# Altium PCB TankBoardPCB1.PcbDoc
Units mm, origin at the board's own origin, x right, y up, seen from the top; angles counter-clockwise.
Board outline 63.56 x 84.17 mm, 2 copper layers (Top Layer, Bottom Layer); 87 components, 60 nets, 330 pads, 226 vias.
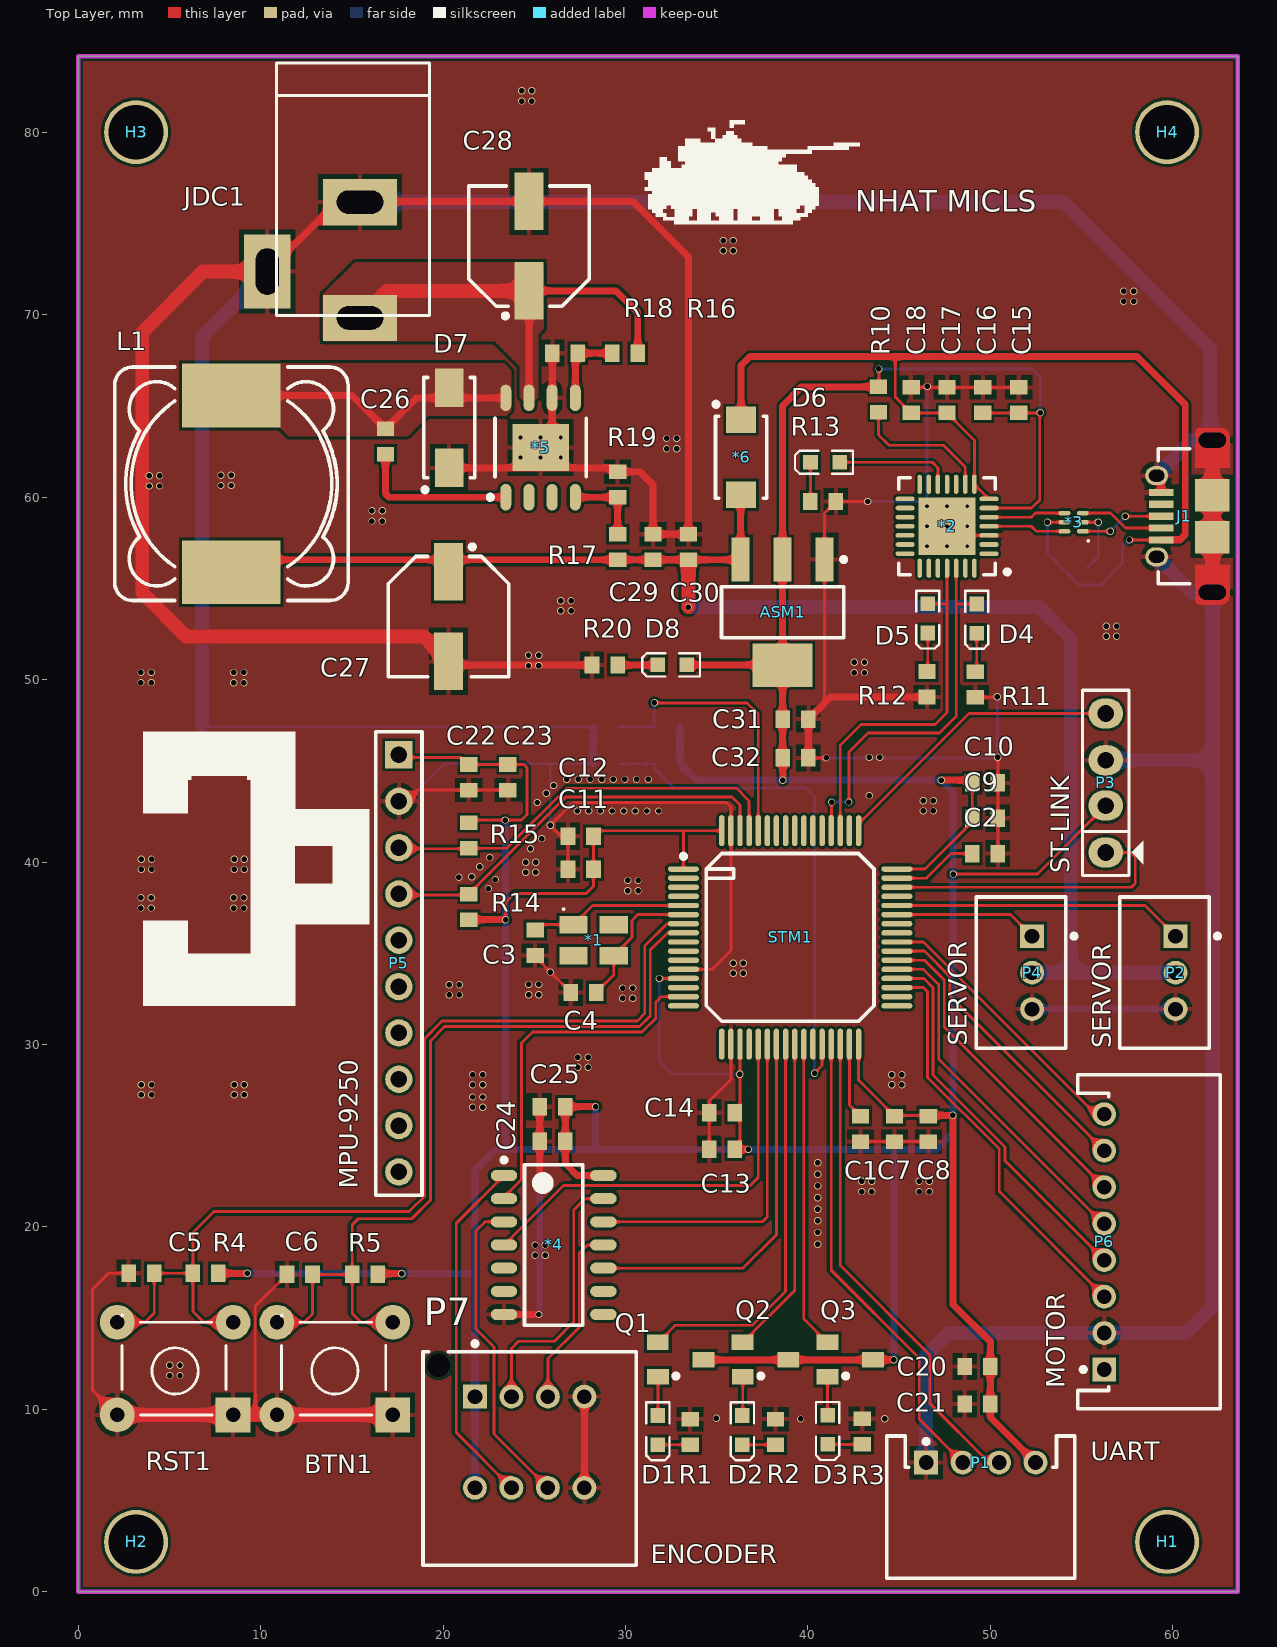
[diagram p0: Top Layer view]
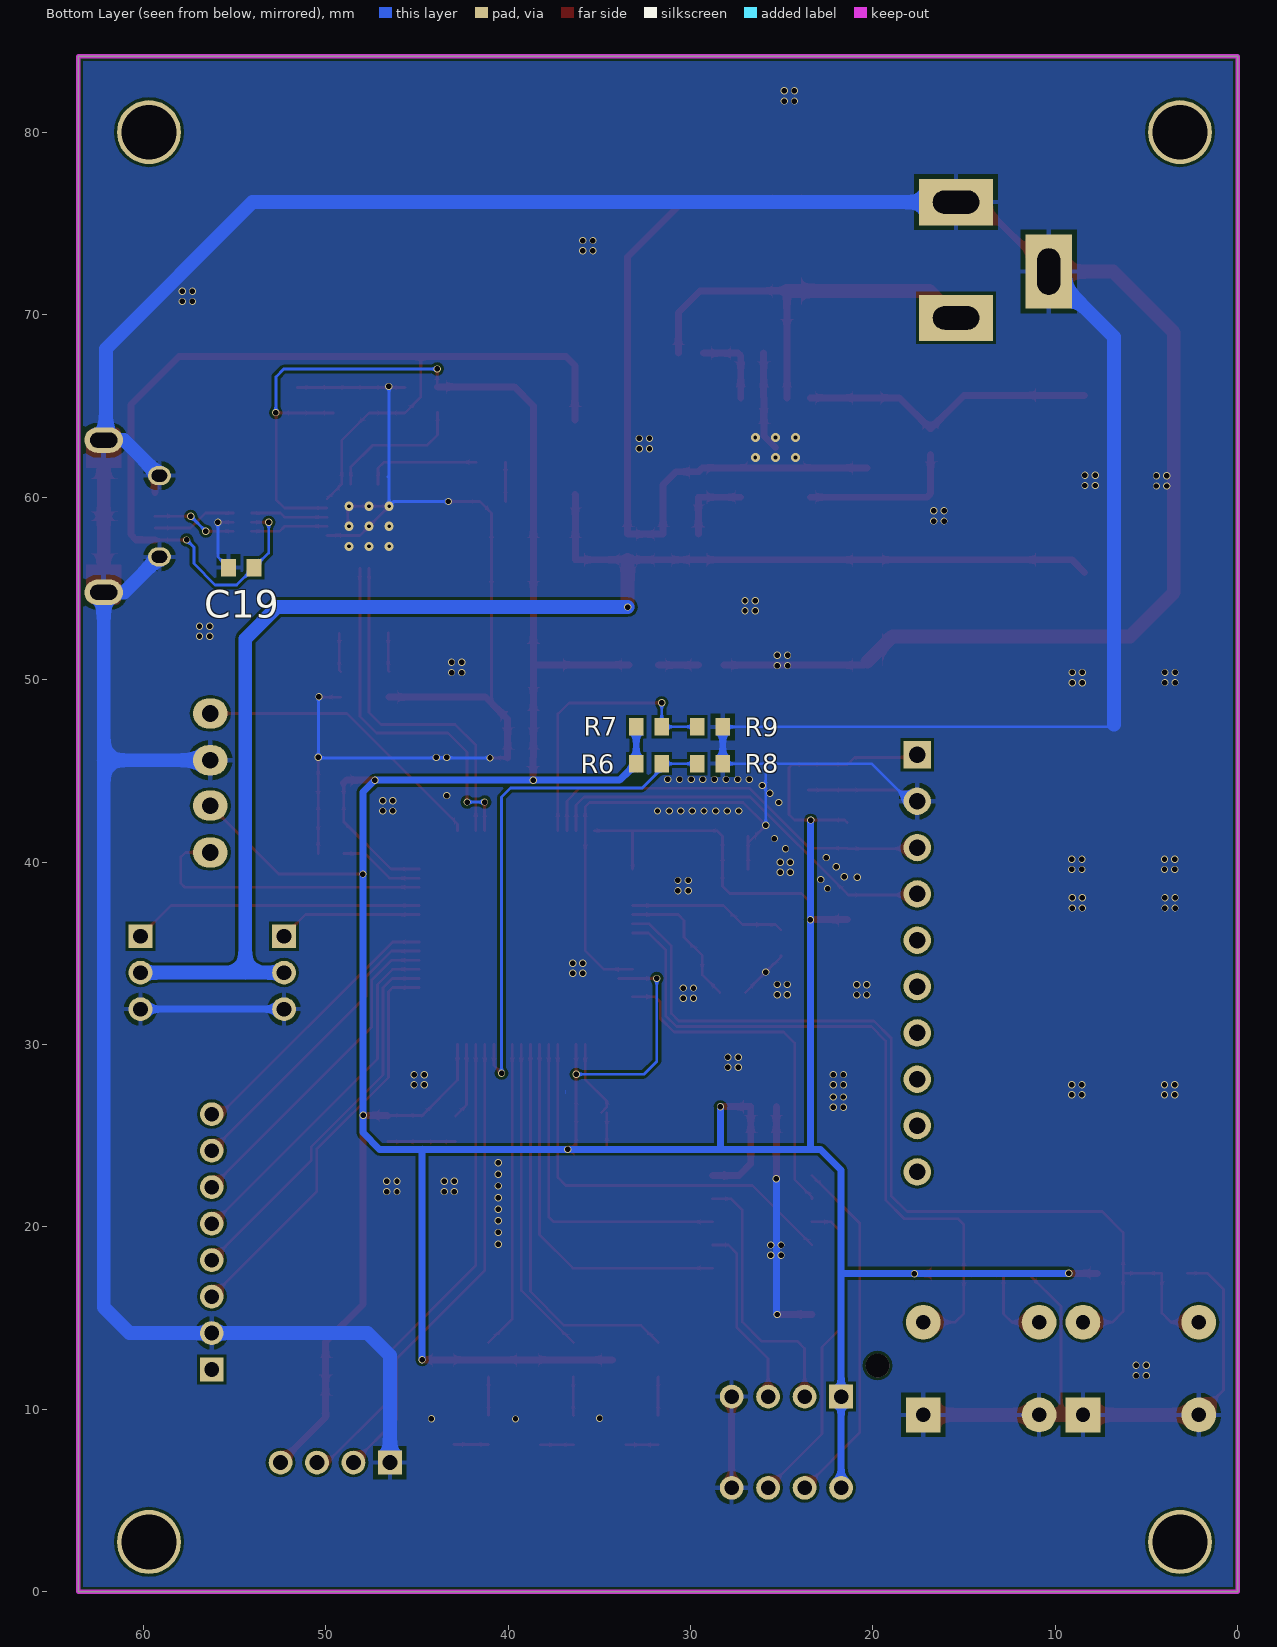
[diagram p1: Bottom Layer view, seen from below]
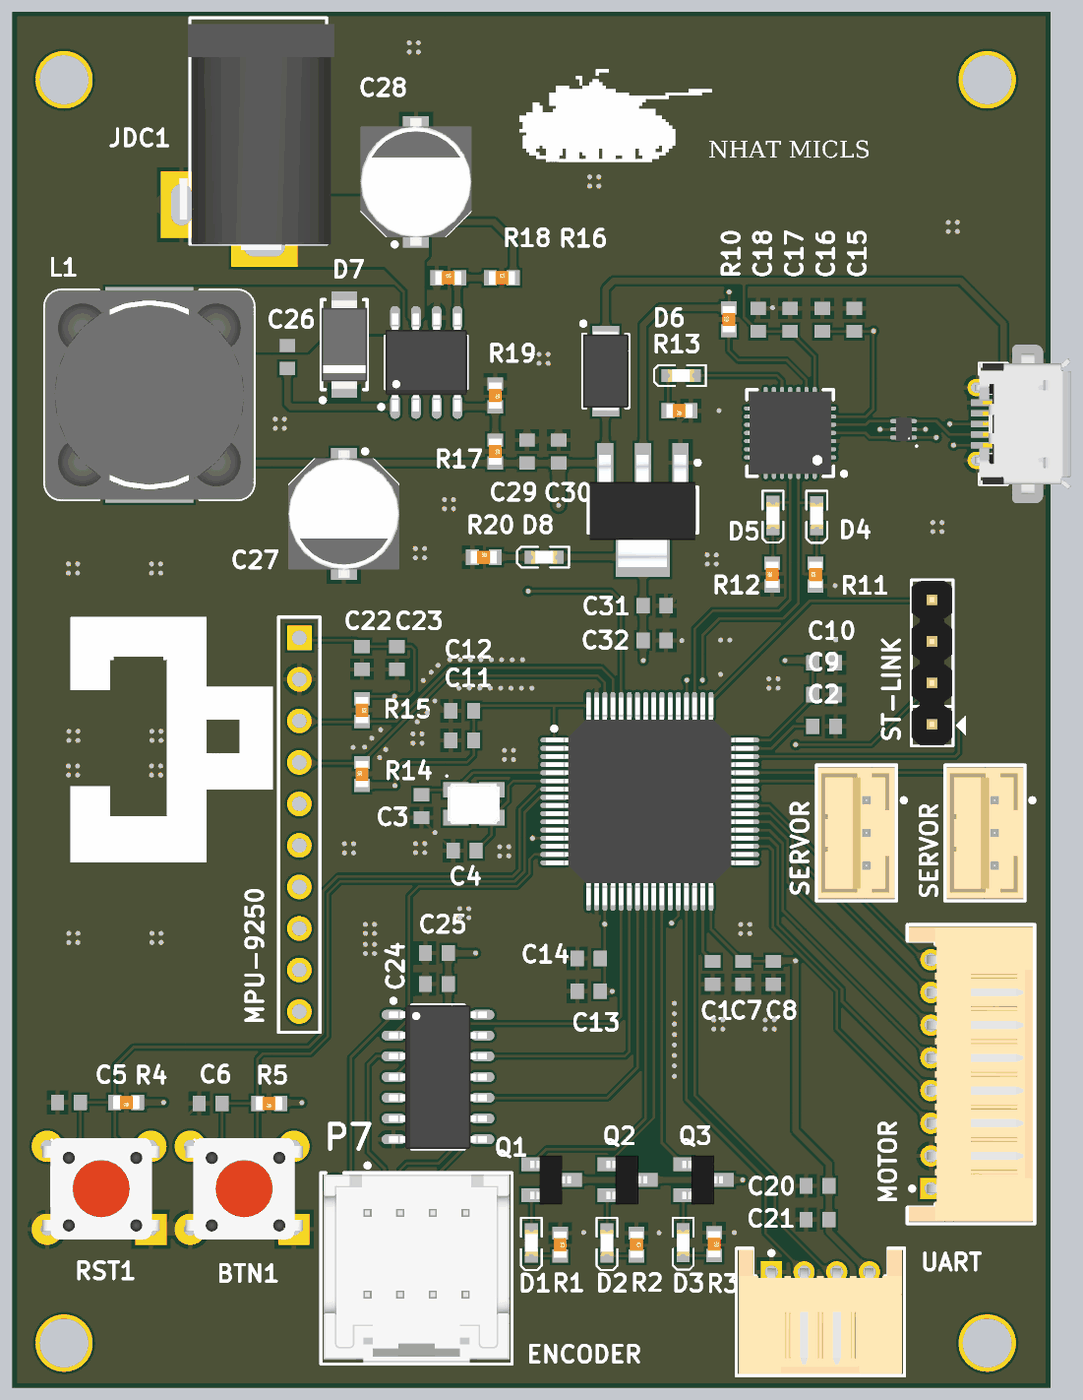
[diagram p2: 3D render of the assembled board from above, using the file's embedded part models]
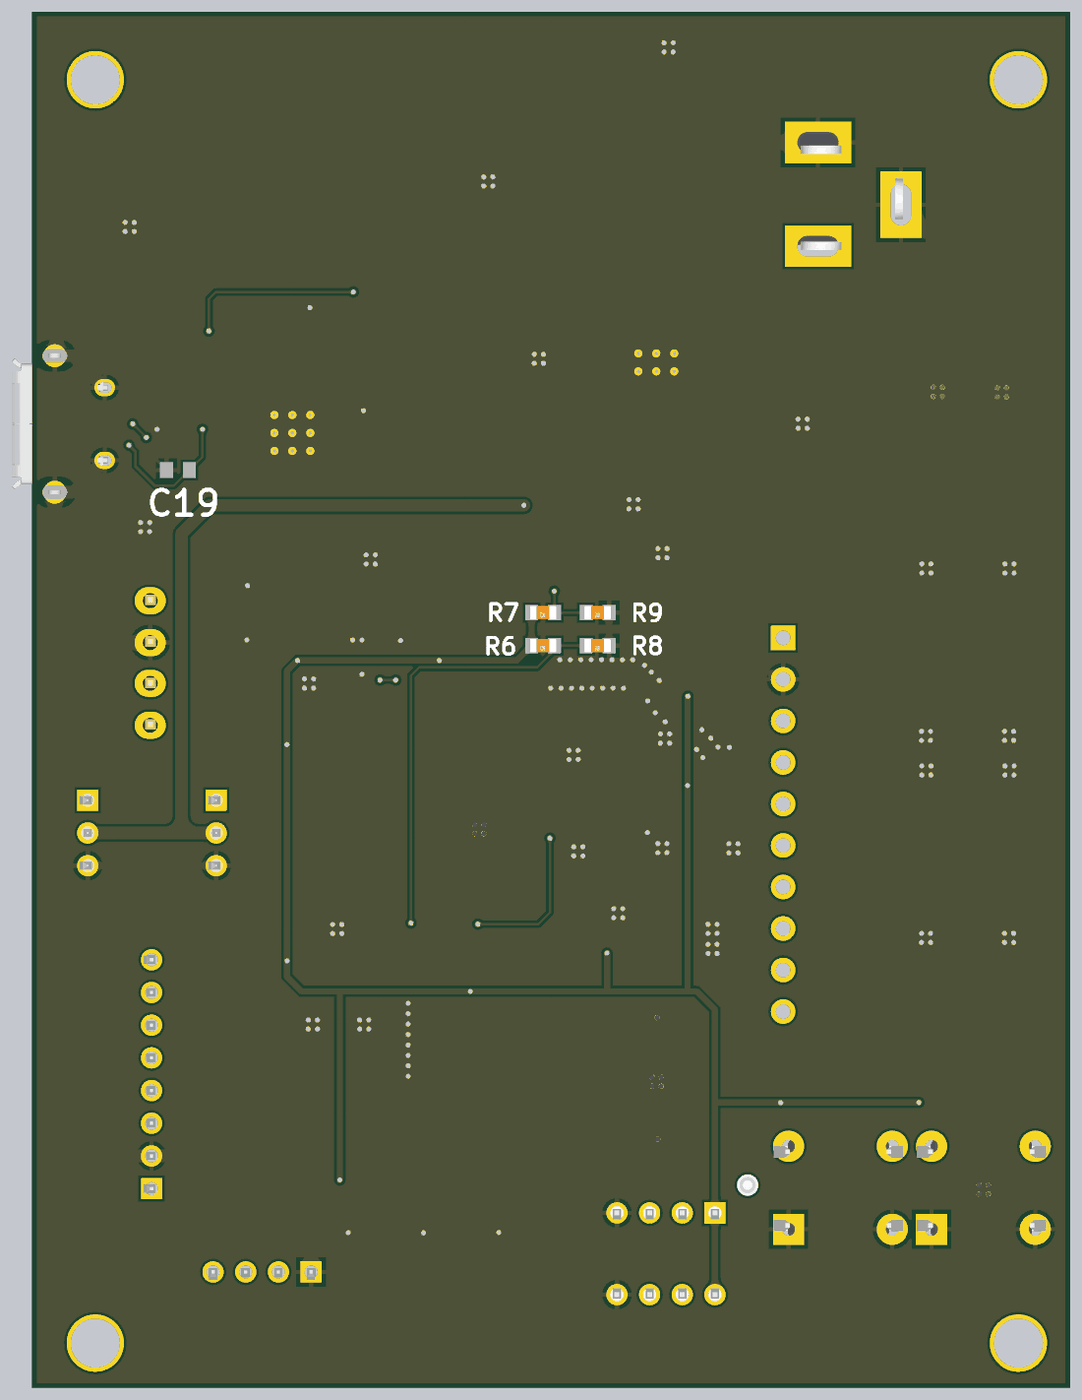
[diagram p3: 3D render of the assembled board from below, using the file's embedded part models]

## Layer stack, top to bottom
Top Solder: solder mask 0.0102, Solder Resist, Dk 3.5
Top Layer: signal copper 0.0356
Dielectric 1: dielectric 0.32, FR-4, Dk 4.8
Bottom Layer: signal copper 0.0356
Bottom Solder: solder mask 0.0102, Solder Resist, Dk 3.5

## Board outline
0,0 0,84.171 63.561,84.171 63.561,0

## Design rules (kind name [scope] priority, off if disabled: settings)
Clearance [All] p1: gap=0.152 ignorepadtopadclearanceinfootprint=FALSE
DiffPairsRouting [All] p1: maxlimit=0.254 minlimit=0.254 mostfreqgap=0.254 toplayer_minwidth=0.152 toplayer_maxwidth=0.762 toplayer_prefwidth=0.381 bottomlayer_minwidth=0.152 bottomlayer_maxwidth=0.762 bottomlayer_prefwidth=0.381 maxuncoupledlength=12.7
HoleSize [All] p1: absolutevalues=TRUE maxlimit=4 minlimit=0.025 maxpercent=80.000 minpercent=20.000
HoleToHoleClearance [All] p1: gap=0 allowstackedmicrovias=TRUE
MinimumSolderMaskSliver [All] p1: minsoldermaskwidth=0
PolygonConnect PolygonConnect_2 [InNet('GND') vs InNet('GND')] p1: thpad.connectstyle=Relief thpad.reliefconductorwidth=0.254 thpad.reliefentries=4 thpad.polygonreliefangle="90 Angle" thpad.airgapwidth=0.254 smdpad.connectstyle=Relief smdpad.reliefconductorwidth=0.254 smdpad.reliefentries=4 smdpad.polygonreliefangle="90 Angle" smdpad.airgapwidth=0.254 via.connectstyle=Direct via.reliefconductorwidth=0.254 via.reliefentries=4 via.polygonreliefangle="90 Angle" via.airgapwidth=0.254
PolygonConnect PolygonConnect_1 [InNet('VIN') vs InNet('VIN')] p2: connectstyle=Direct reliefconductorwidth=0.254 reliefentries=4 polygonreliefangle="90 Angle" airgapwidth=0.254
PolygonConnect [InNet('PH') vs InNet('PH')] p3: connectstyle=Direct reliefconductorwidth=0.254 reliefentries=4 polygonreliefangle="90 Angle" airgapwidth=0.254
RoutingVias [All] p1: holewidth=0.3 width=0.4 viastyle="Through Hole" minholewidth=0.2 minwidth=0.4 maxholewidth=0.711 maxwidth=1.27
SilkToSilkClearance [All] p1: silktosilkclearance=0
SilkToSolderMaskClearance [IsPad] p1: minsilkscreentomaskgap=0 clearancetoexposedcopper=TRUE
SolderMaskExpansion [All] p1: expansion=0
Width [All] p1: maxlimit=0.762 minlimit=0.152 preferedwidth=0.381
24 further rules are at their usual default settings.

## Classes and differential pairs
component class TankBoardSheet4: *5 *6 ASM1 C26 C27 C28 C29 C30 C31 C32 D7 D8 JDC1 L1 R16 R17 R18 R19 R20
component class TankBoardSheet3: *4 C20 C21 C22 C23 C24 C25 H1 H2 H3 H4 P1 P2 P3 P4 P5 P7 R14 R15
component class TankBoardSheet2: *2 *3 C15 C16 C17 C18 C19 D4 D5 D6 J1 R10 R11 R12 R13
component class TankBoardSheet1: *1 BTN1 C1 C2 C3 C4 C5 C6 C7 C8 C9 C10 C11 C12 C13 C14 D1 D2 D3 Q1 Q2 Q3 R1 R2 R3 R4 R5 R6 R7 R8 R9 RST1 STM1
differential pair D1: +D1_P -D1_N
differential pair D: +D_P -D_N

## Components (designator, comment, footprint, x,y, rotation, side; value= is the part's Value field where it differs from the comment)
*1 "XTAL" "XTAL SMD 4PIN" 28.251,35.721 r0 top
*2 "CP2102" QFN50P500X500X90_HS-29N 47.624,58.407 r180 top
*3 "USBULC6-2M6" QFN50P100X145X60-6N 54.566,58.628 r180 top
*4 "74HC14" SOIC108P600X170-14N 26.063,19.006 r0 top
*5 "TPS5430" SOIC127P600X170_HS-9N 25.341,62.724 r90 top
*6 "Diode" "DIODE SMA (DO-214AC)" 36.334,62.194 r90 top
ASM1 "LM1117" SOT223-4N 38.609,53.687 r270 top value=LM317
BTN1 "SW" "Tact SW 4 pin" 17.241,9.691 r180 top value="Button chip 4 pin"
C1 "Cap Non-Pol SMD" CAP-SM-0603 42.882,25.375 r90 top value=100pF
C2 "Cap Non-Pol SMD" CAP-SM-0603 49.712,40.461 r180 top value=100pF
C3 "Cap Non-Pol SMD" CAP-SM-0603 25.046,35.576 r90 top value=100pF
C4 "Cap Non-Pol SMD" CAP-SM-0603 27.693,32.852 r0 top value=100pF
C5 "Cap Non-Pol SMD" CAP-SM-0603 3.462,17.455 r180 top value=100nF
C6 "Cap Non-Pol SMD" CAP-SM-0603 12.14,17.394 r180 top value=100nF
C7 "Cap Non-Pol SMD" CAP-SM-0603 44.741,25.375 r270 top value=100nF
C8 "Cap Non-Pol SMD" CAP-SM-0603 46.601,25.375 r270 top value=10uF
C9 "Cap Non-Pol SMD" CAP-SM-0603 49.712,42.4 r0 top value=100nF
C10 "Cap Non-Pol SMD" CAP-SM-0603 49.712,44.339 r0 top value=10uF
C11 "Cap Non-Pol SMD" CAP-SM-0603 27.544,39.606 r180 top value=100nF
C12 "Cap Non-Pol SMD" CAP-SM-0603 27.544,41.413 r180 top value=10uF
C13 "Cap Non-Pol SMD" CAP-SM-0603 35.29,24.255 r180 top value=100nF
C14 "Cap Non-Pol SMD" CAP-SM-0603 35.29,26.26 r180 top value=10uF
C15 "Cap Non-Pol SMD" CAP-SM-0603 51.555,65.319 r90 top value=100nF
C16 "Cap Non-Pol SMD" CAP-SM-0603 49.589,65.319 r90 top value=10uF
C17 "Cap Non-Pol SMD" CAP-SM-0603 47.624,65.319 r90 top value=100nF
C18 "Cap Non-Pol SMD" CAP-SM-0603 45.658,65.319 r90 top value=10uF
C19 "Cap Non-Pol SMD" CAP-SM-0603 54.629,56.141 r0 bottom value=100nF
C20 "Cap Non-Pol SMD" CAP-SM-0603 49.299,12.349 r180 top value=100nF
C21 "Cap Non-Pol SMD" CAP-SM-0603 49.299,10.291 r180 top value=10uF
C22 "Cap Non-Pol SMD" CAP-SM-0603 21.403,44.646 r270 top value=100nF
C23 "Cap Non-Pol SMD" CAP-SM-0603 23.549,44.646 r270 top value=10uF
C24 "Cap Non-Pol SMD" CAP-SM-0603 25.997,24.689 r180 top value=100nF
C25 "Cap Non-Pol SMD" CAP-SM-0603 25.997,26.587 r180 top value=10uF
C26 "Cap Non-Pol SMD" CAP-SM-0603 16.839,63.053 r270 top value=10nF
C27 "Cap Pol SMD" "CAP ALU SIZE D" 20.298,53.452 r270 top value=220uF
C28 "Cap Pol SMD" "CAP ALU SIZE D" 24.711,73.765 r90 top value=220uF
C29 "Cap Non-Pol SMD" CAP-SM-0603 31.507,57.273 r90 top value=100nF
C30 "Cap Non-Pol SMD" CAP-SM-0603 33.447,57.273 r90 top value=10uF
C31 "Cap Non-Pol SMD" CAP-SM-0603 39.325,47.833 r0 top value=100nF
C32 "Cap Non-Pol SMD" CAP-SM-0603 39.325,45.709 r0 top value=10uF
D1 "LED SMD" LED_0603_Blue 31.777,8.858 r270 top
D2 "LED SMD" LED_0603_Blue 36.408,8.858 r270 top
D3 "LED SMD" LED_0603_Blue 41.075,8.875 r270 top
D4 "LED SMD" LED_0603_Blue 49.252,53.345 r270 top
D5 "LED SMD" LED_0603_Blue 46.569,53.354 r270 top
D6 "LED SMD" LED_0603_Blue 40.942,61.918 r180 top
D7 "D Schottky" SS34 20.33,63.809 r90 top
D8 "LED SMD" LED_0603_Blue 32.561,50.809 r180 top
H1 "Hole" "LO KHOAN 3MM" 59.688,2.731 r0 top
H2 "Hole" "LO KHOAN 3MM" 3.166,2.731 r0 top
H3 "Hole" "LO KHOAN 3MM" 3.166,80.012 r0 top
H4 "Hole" "LO KHOAN 3MM" 59.688,80.012 r0 top
J1 "629105150921" 629105150921 62.168,58.957 r90 top
JDC1 "Jack DC" DC-IN 12.9,73.003 r270 top value="Jac DC"
L1 "Inductor" "INDUCTOR 12.5x12.5" 8.39,60.735 r270 top value=22uH
P1 "62000411722" 62000411722 49.476,4.632 r0 top
P2 "62000311622" 62000311622 59.551,33.936 r90 top
P3 "Header 4" JP4 56.325,43.066 r90 top
P4 "62000311622" 62000311622 51.684,33.936 r90 top
P5 "Header 10" HDR1X10 17.572,45.873 r270 top
P6 "62000811722" 62000811722 58.694,19.18 r90 top
P7 "62400821622" 62400821622 24.746,7.295 r0 top
Q1 "C1815" SOT23B 33.019,12.714 r270 top
Q2 "C1815" SOT23B 37.669,12.714 r270 top
Q3 "C1815" SOT23B 42.32,12.714 r270 top
R1 "RESISTOR SMD" RES-SM-0603 33.542,9.445 r270 top value=1K
R2 "RESISTOR SMD" RES-SM-0603 38.218,9.446 r270 top value=1K
R3 "RESISTOR SMD" RES-SM-0603 42.973,9.47 r270 top value=1K
R4 "RESISTOR SMD" RES-SM-0603 7.667,17.455 r180 top value=10K
R5 "RESISTOR SMD" RES-SM-0603 16.403,17.394 r180 top value=10K
R6 "RESISTOR SMD" RES-SM-0603 31.589,45.394 r0 bottom value=0
R7 "RESISTOR SMD" RES-SM-0603 31.589,47.411 r0 bottom value=0
R8 "RESISTOR SMD" RES-SM-0603 28.248,45.394 r0 bottom value=0
R9 "RESISTOR SMD" RES-SM-0603 28.248,47.411 r0 bottom value=0
R10 "RESISTOR SMD" RES-SM-0603 43.866,64.668 r90 top value=4.7K
R11 "RESISTOR SMD" RES-SM-0603 49.178,49.05 r90 top value=1K
R12 "RESISTOR SMD" RES-SM-0603 46.523,49.06 r90 top value=1K
R13 "RESISTOR SMD" RES-SM-0603 41.519,59.765 r180 top value=1K
R14 "RESISTOR SMD" RES-SM-0603 21.403,36.856 r90 top value=10K
R15 "RESISTOR SMD" RES-SM-0603 21.403,42.139 r270 top value=10K
R16 "RESISTOR SMD" RES-SM-0603 29.283,67.896 r0 top value=1K
R17 "RESISTOR SMD" RES-SM-0603 29.567,57.959 r270 top value=10K
R18 "RESISTOR SMD" RES-SM-0603 26.001,67.896 r0 top value=1K
R19 "RESISTOR SMD" RES-SM-0603 29.567,61.383 r270 top value=3.24K
R20 "RESISTOR SMD" RES-SM-0603 28.177,50.8 r0 top value=1K
RST1 "SW" "Tact SW 4 pin" 8.485,9.691 r180 top value="Button chip 4 pin"
STM1 "STM32F405" CQFP50P1150X1150X160-64N 39.024,35.867 r0 top

## Footprints (in the part's own frame and the unit in brackets; to place one, negate y for a bottom-side part, rotate by r counter-clockwise, add the part's x,y. Pads: shape width x height; smd on the part's side, far side on the other; paste and mask are expansions set on the pad)
62000311622 [mm] "2.00mm Male Vertical Shrouded Header, 3p"
  rect 1.3x1.3 hole 0.8: 1(2,-0.6)
  round 1.3 hole 0.8: 2(0,-0.6) 3(-2,-0.6)
  silkscreen extent -4.15,-3.03 4.15,2.45, body extent -4,-2.35 4,2.35, height 6.13
62000411722 [mm] "2.00mm Male Horizontal Shrouded Header, 4p"
  rect 1.3x1.3 hole 0.8: 1(-3,2.45)
  round 1.3 hole 0.8: 2(-1,2.45) 3(1,2.45) 4(3,2.45)
  silkscreen extent -5.15,-3.9 5.15,3.9, body extent -5,-3.8 5,3.8, height 4.83
62000811722 [mm] "2.00mm Male Horizontal Shrouded Header, 8p"
  rect 1.3x1.3 hole 0.8: 1(-7,2.45)
  round 1.3 hole 0.8: 2(-5,2.45) 3(-3,2.45) 4(-1,2.45) 5(1,2.45) 6(3,2.45) 7(5,2.45) 8(7,2.45)
  silkscreen extent -9.15,-3.9 9.15,3.9, body extent -9,-3.8 9,3.8, height 4.83
62400821622 [mm] "2.00mm Male Dual Row Vertical Shrouded Header with positive locking, 8p"
  rect 1.3x1.3 hole 0.8: 1(-3,3.4)
  round 1.3 hole 0.8: 2(-3,-1.6) 3(-1,3.4) 4(-1,-1.6) 5(1,3.4) 6(1,-1.6) 7(3,3.4) 8(3,-1.6)
  round 1.3 hole 1.3 unplated: MH1(-5,5.1)
  silkscreen extent -5.85,-5.85 5.85,6.42, body extent -5.7,-5.75 5.7,5.75, height 9.78
629105150921 [mm] "Micro USB 2.0 Type AB Horizontal"
  rect 0.4x1.35 smd: 1(-1.3,2.805) 2(-0.65,2.805) 3(0,2.805) 4(0.65,2.805) 5(1.3,2.805)
  round 0 / inner oval 1.4x2.1 / far side oval 1.4x2.1 hole 0.825 slot 1.5 at 90 deg: Shell(-4.175,0)
  oval 1.05x1.25 hole 0.65 slot 0.85 at 90 deg: Shell(-2.225,3.055) Shell(2.225,3.055)
  rect 1.8x1.9 smd: Shell(-1.15,0) Shell(1.15,0)
  round 0 / inner round 0 / far side oval 1.4x2.1 hole 0.825 slot 1.5 at 90 deg: Shell(4.175,0)
  Top Layer region: 4.353,-0.95 4.544,-0.912 4.706,-0.804 4.814,-0.641 4.852,-0.45 4.852,-0.45 4.852,0.65 4.83,0.765 4.765,0.862 4.667,0.927 4.553,0.95 4.553,0.95 2.668,0.95 2.668,-0.95
  Top Layer region: -4.353,-0.95 -4.544,-0.912 -4.706,-0.804 -4.814,-0.641 -4.852,-0.45 -4.852,-0.45 -4.852,0.65 -4.83,0.765 -4.765,0.862 -4.667,0.927 -4.553,0.95 -4.553,0.95 -2.668,0.95 -2.668,-0.95
  silkscreen extent -3.7,1.25 3.7,2.97, body extent -4.3,-2.64 4.3,3.23, height 2.76
"CAP ALU SIZE D" [mm] "Capacitor, Aluminium Electrolytric, 6.6mm L X 6.6mm W X 5.4mm H, IPC Medium Density"
  rect 3.15x1.6 smd: 1(-2.45,0) 2(2.45,0)
  silkscreen extent -3.95,-3.3 3.3,3.3, body extent -3.9,-3.4 3.9,3.4, height 5.7
CAP-SM-0603 [mm] "SMD Ceramic Capacitor Size 0603"
  rect 0.8x0.95 smd: 1(-0.7,0) 2(0.7,0)
  body extent -0.85,-0.45 0.85,0.45, height 0.6
CQFP50P1150X1150X160-64N [mm] "CQFP, 64-Leads, Body 11.50x11.50mm, Pitch 0.50mm, IPC Medium Density"
  oval 1.7x0.3 smd: 1(-5.85,3.75) 2(-5.85,3.25) 3(-5.85,2.75) 4(-5.85,2.25) 5(-5.85,1.75) 6(-5.85,1.25) 7(-5.85,0.75) 8(-5.85,0.25) 9(-5.85,-0.25) 10(-5.85,-0.75) 11(-5.85,-1.25) 12(-5.85,-1.75) 13(-5.85,-2.25) 14(-5.85,-2.75) 15(-5.85,-3.25) 16(-5.85,-3.75) 33(5.85,-3.75) 34(5.85,-3.25) 35(5.85,-2.75) 36(5.85,-2.25) 37(5.85,-1.75) 38(5.85,-1.25) 39(5.85,-0.75) 40(5.85,-0.25) 41(5.85,0.25) 42(5.85,0.75) 43(5.85,1.25) 44(5.85,1.75) 45(5.85,2.25) 46(5.85,2.75) 47(5.85,3.25) 48(5.85,3.75)
  oval 0.3x1.7 smd: 17(-3.75,-5.85) 18(-3.25,-5.85) 19(-2.75,-5.85) 20(-2.25,-5.85) 21(-1.75,-5.85) 22(-1.25,-5.85) 23(-0.75,-5.85) 24(-0.25,-5.85) 25(0.25,-5.85) 26(0.75,-5.85) 27(1.25,-5.85) 28(1.75,-5.85) 29(2.25,-5.85) 30(2.75,-5.85) 31(3.25,-5.85) 32(3.75,-5.85) 49(3.75,5.85) 50(3.25,5.85) 51(2.75,5.85) 52(2.25,5.85) 53(1.75,5.85) 54(1.25,5.85) 55(0.75,5.85) 56(0.25,5.85) 57(-0.25,5.85) 58(-0.75,5.85) 59(-1.25,5.85) 60(-1.75,5.85) 61(-2.25,5.85) 62(-2.75,5.85) 63(-3.25,5.85) 64(-3.75,5.85)
  silkscreen extent -5.97,-4.6 4.6,4.6, body extent -6.35,-6.35 6.35,6.35, height 1.53
DC-IN [mil] "Jac DC input"
  rect 100x160 hole 50 slot 100 at 90 deg: 1(125,100) 2(-125,100)
  rect 160x100 hole 50 slot 100 at 0 deg: 3(25,-100)
  silkscreen extent -425,-80 120,250, body extent -410,-105 134,269, height 434
"DIODE SMA (DO-214AC)" [mm]
  rect 1.45x1.65 smd: 1(-2.05,0) 2(2.05,0)
  silkscreen extent -2.25,-1.4 3.02,1.5, body extent -2.47,-1.4 2.47,1.4, height 2.3
HDR1X10 [mm] "Connector; Header; 10 Position"
  rect 1.5x1.5 hole 0.9: 1(0,0)
  round 1.5 hole 0.9: 2(2.54,0) 3(5.08,0) 4(7.62,0) 5(10.16,0) 6(12.7,0) 7(15.24,0) 8(17.78,0) 9(20.32,0) 10(22.86,0)
  silkscreen extent -1.27,-1.27 24.13,1.27
"INDUCTOR 12.5x12.5" [mm] "SMD Inductor  Body Width 12.5mm Body Lenght 12.5mm Height 8mm"
  rect 3.5x5.4 smd: 1(-4.85,0) 2(4.85,0)
  silkscreen extent -6.4,-6.4 6.4,6.4, body extent -6.4,-6.4 6.4,6.4, height 8
JP4 [mil] "Jumper 4"
  oval 65x75 hole 36: 1(-100,0) 2(1,0) 3(99,0) 4(200,0)
  silkscreen extent -150,-81 250,50, body extent -148,-48 248,50, height 323
LED_0603_Blue [mm] "Chip LED, 2-Leads, Body 1.6x0.8mm, IPC Medium Density"
  rect 0.8x0.8 smd: 1(-0.8,0) 2(0.8,0)
  silkscreen extent -1.52,-0.64 1.65,0.64, body extent -0.8,-0.4 0.8,0.4, height 0.7
"LO KHOAN 3MM" [mil]
  round 138 hole 118.1: 1(0,0)
QFN50P100X145X60-6N [mm] "QFN, 6-Leads, Body 1.00x1.45mm, Pitch 0.50mm, IPC Medium Density"
  oval 0.65x0.25 smd: 1(-0.5,0.5) 2(-0.5,0) 3(-0.5,-0.5) 4(0.5,-0.5) 5(0.5,0) 6(0.5,0.5)
  silkscreen extent -0.85,0.98 -0.75,1.07, body extent -0.52,-0.72 0.52,0.72, height 0.6
QFN50P500X500X90_HS-29N [mm] "QFN, 28-Leads, Body 5.00x5.00mm, Pitch 0.50mm, Thermal Pad 3.13x3.13mm, IPC Medium Density"
  oval 1.05x0.25 smd: 1(-2.3,1.5) 2(-2.3,1) 3(-2.3,0.5) 4(-2.3,0) 5(-2.3,-0.5) 6(-2.3,-1) 7(-2.3,-1.5) 15(2.3,-1.5) 16(2.3,-1) 17(2.3,-0.5) 18(2.3,0) 19(2.3,0.5) 20(2.3,1) 21(2.3,1.5)
  oval 0.25x1.05 smd: 8(-1.5,-2.3) 9(-1,-2.3) 10(-0.5,-2.3) 11(0,-2.3) 12(0.5,-2.3) 13(1,-2.3) 14(1.5,-2.3) 22(1.5,2.3) 23(1,2.3) 24(0.5,2.3) 25(0,2.3) 26(-0.5,2.3) 27(-1,2.3) 28(-1.5,2.3)
  rect 3.13x3.13 smd: 29(0,0)
  silkscreen extent -3.43,-2.65 2.65,2.65, body extent -2.52,-2.52 2.52,2.52, height 0.9
RES-SM-0603 [mm]
  rect 0.8x0.95 smd: 1(-0.014,0) 2(1.386,0)
  body extent -0.11,-0.4 1.49,0.4, height 0.3
SOIC108P600X170-14N [mm] "SOIC, 14-Leads, Body 8.65x3.90mm, Pitch 1.27mm, IPC Medium Density"
  oval 1.45x0.6 smd: 1(-2.725,3.81) 2(-2.725,2.54) 3(-2.725,1.27) 4(-2.725,0) 5(-2.725,-1.27) 6(-2.725,-2.54) 7(-2.725,-3.81) 8(2.725,-3.81) 9(2.725,-2.54) 10(2.725,-1.27) 11(2.725,0) 12(2.725,1.27) 13(2.725,2.54) 14(2.725,3.81)
  silkscreen extent -2.85,-4.4 1.6,4.78, body extent -3,-4.4 3,4.4, height 1.7
SOIC127P600X170_HS-9N [mm] "SOIC, 8-Leads, Body 4.90x3.90mm, Pitch 1.27mm, Thermal Pad 3.10x2.60mm, IPC Medium Density"
  oval 1.45x0.6 smd: 1(-2.725,1.905) 2(-2.725,0.635) 3(-2.725,-0.635) 4(-2.725,-1.905) 5(2.725,-1.905) 6(2.725,-0.635) 7(2.725,0.635) 8(2.725,1.905)
  rect 2.6x3.1 smd: 9(0,0)
  silkscreen extent -2.85,-2.5 1.6,2.88, body extent -3,-2.5 3,2.5, height 1.7
SOT23B [mm] "SOT 23B"
  rect 0.85x1.2 smd: 1(0.94,-1.245) 2(0,1.25) 3(-0.95,-1.25)
  silkscreen extent 0.77,-0.38 1.02,-0.13, body extent -1.5,-1.3 1.5,1.2, height 1.06
SOT223-4N [mm] "SOT223, 4-Leads, Body 6.5x3.5mm, Pitch 2.3mm, Lead Span 7mm, IPC Medium Density"
  rect 2.4x1 smd: 1(-2.9,2.3) 2(-2.9,0) 3(-2.9,-2.3)
  rect 2.4x3.3 smd: 4(2.9,0)
  silkscreen extent -3.02,-3.35 1.4,3.48, body extent -3.39,-3.27 3.5,3.23, height 1.72
SS34 [mm] "DO-214-AC/SMA Molded Diode, Body 5.3x2.6mm, IPC Medium Density"
  rect 2.1x1.55 smd: 1(-2.2,0) 2(2.2,0)
  silkscreen extent -3.52,-1.4 2.75,1.45, body extent -2.75,-1.4 2.75,1.4, height 2.3
"Tact SW 4 pin" [mil] "SW button 4pin, 250 x250 mil"
  rect 75x75 hole 31: 1(0,0)
  round 75 hole 31: 2(250,-200) 3(250,0) 4(0,-200)
  silkscreen extent 15,-215 240,0, body extent -36,-220 276,24, height 276
"XTAL SMD 4PIN" [mm]
  rect 1.55x0.95 smd: 1(-1.1,0.85) 2(-1.1,-0.85) 3(1.1,-0.85) 4(1.1,0.85)
  silkscreen extent -1.7,1.65 -1.6,1.75, body extent -1.6,-1.25 1.6,1.25, height 0.55

## Part data
ASM1: "Available in 1.8V, 2.5V, 2.85V, 3.3V, 5V, and  Adjustable Versions"
BTN1 RST1: library part "Tact SW - 4Pin", "Switch button 4 pin"
C1 C2 C3 C4 C5 C6 C7 C8 C9 C10 C11 C12 C13 C14 C15 C16 C17 C18 C19 C20 C21 C22 C23 C24 C25 C26 C29 C30 C31 C32: "Capacitor"
C27 C28: "Polarized Capacitor (Radial)"
D1 D2 D3 D4 D5 D6 D8: "LED"
D7: "Schottky Diode", Code_JEDEC=DO-214-AA, LatestRevisionDate=17-Jul-2002, LatestRevisionNote="Re-released for DXP Platform.", PackageDescription="DO-214-AA/SMB; 2 C-Bend Leads; Body 5.3 x 3.6 mm, inc. leads (LxW)", PackageReference=SMB, Published=8-Jun-2000, Publisher="Altium Limited"
H1 H2 H3 H4: "Hole 3mm"
J1: "Micro USB 2.0 Type AB Receptacle WR-COM, Horizontal, SMT", Contact Resistance="30 mOhm", Operating Temperature="-40 to 85 degC", Rated Current="1.8 A", Working Voltage="30 VAC", ComponentLink1Description=Manufacturer, ComponentLink1URL=http://www.we-online.de, ComponentLink2Description=Datasheet, ComponentLink2URL=https://katalog.we-online.de/em/datasheet/629105150921.pdf, Connector Type="Micro USB 2.0 Type AB", Gender=Receptacle, Mounting Technology=SMT, Orientation=Horizontal, Packaging="Tape and Reel", Part Number=629105150921, Published Date="September 2018", Publisher="Wurth Elektronik"
JDC1: "Jack DC input"
P1: "WR-WTB THT Male Horizontal Shrouded Header, pitch 2mm, 4p", Contact Resistance=20mOhm, Operating Temperature="-25 to +85degC", Rated Current=2A, Withstanding Voltage=800VAC, Working Voltage=125VAC, ComponentLink1Description=Manufacturer, ComponentLink1URL=http://www.we-online.de, ComponentLink2Description=Datasheet, ComponentLink2URL=https://www.we-online.com/catalog/datasheet/62000411722.pdf, Gender=Male, Mounting Technology=THT, Packaging=Bag, Part Number=62000411722, Pin Number=4, Pitch=2mm, Published Date="January 2020", Publisher="Wurth Elektronik", Type=Horizontal
P2 P4: "WR-WTB Male Vertical Shrouded Header, pitch 2mm, 3p", Contact Resistance=20mOhm, Operating Temperature="-25 to +85degC", Rated Current=2A, Withstanding Voltage=800VAC, Working Voltage=125VAC, ComponentLink1Description=Manufacturer, ComponentLink1URL=http://www.we-online.de, ComponentLink2Description=Datasheet, ComponentLink2URL=https://www.we-online.com/catalog/datasheet/62000311622.pdf, Gender=Male, Mounting Technology=THT, Packaging=Bag, Part Number=62000311622, Pin Number=3, Pitch=2mm, Published Date="January 2020", Publisher="Wurth Elektronik", Type=Vertical
P3: "Header, 4-Pin", LatestRevisionDate=17-Jul-2002, LatestRevisionNote="Re-released for DXP Platform.", Publisher="Altium Limited"
P5: "Header, 10-Pin", LatestRevisionDate=17-Jul-2002, LatestRevisionNote="Re-released for DXP Platform.", Publisher="Altium Limited"
P6: "WR-WTB THT Male Horizontal Shrouded Header, pitch 2mm, 8p", Contact Resistance=20mOhm, Operating Temperature="-25 to +85degC", Rated Current=2A, Withstanding Voltage=800VAC, Working Voltage=125VAC, ComponentLink1Description=Manufacturer, ComponentLink1URL=http://www.we-online.de, ComponentLink2Description=Datasheet, ComponentLink2URL=https://www.we-online.com/catalog/datasheet/62000811722.pdf, Gender=Male, Mounting Technology=THT, Packaging=Bag, Part Number=62000811722, Pin Number=8, Pitch=2mm, Published Date="January 2020", Publisher="Wurth Elektronik", Type=Horizontal
P7: "WR-WTB THT Male Vertical Shrouded Header with positive locking, Dual Row, pitch 2mm, 8p", Contact Resistance=20mOhm, Operating Temperature="-25 to +85degC", Rated Current=3A, Withstanding Voltage=1000VAC, Working Voltage=250VAC, ComponentLink1Description=Manufacturer, ComponentLink1URL=http://www.we-online.de, ComponentLink2Description=Datasheet, ComponentLink2URL=https://www.we-online.com/catalog/datasheet/62400821622.pdf, Gender=Male, Mounting Technology=THT, Packaging=Tube, Part Number=62400821622, Pin Number=8, Pitch=2mm, Published Date="January 2020", Publisher="Wurth Elektronik", Type=Vertical
Q1 Q2 Q3: "NPN Bipolar Transistor"
R1 R2 R3 R4 R5 R6 R7 R8 R9 R10 R11 R12 R13 R14 R15 R16 R17 R18 R19 R20: "Resistor"

## Via types
v1: diameter 0.4, hole 0.3, Top Layer to Bottom Layer, tented both sides, 211 vias
v2: diameter 0.5, hole 0.2, Top Layer to Bottom Layer, 15 vias

## Nets (pads, with @x,y where several pads share a name; then routed paths per layer and width w, separated by ;. In a path a pad name is that pad's centre, name@x,y a point inside that pad or via, vN(x,y) a via of type N, cw(c..) or ccw(c..) an arc to the next point about the centre after c; other vN are vias at no path point)
+3.3: *2.6 *4.14 ASM1.2 ASM1.4 C7.1 C8.1 C9.1 C10.1 C11.1 C12.1 C13.1 C14.1 C15.1 C16.1 C20.1 C21.1 C22.1 C23.1 C24.1 C25.1 C31.1 C32.1 D8.1 P1.4 P3.2 P5.1 P7.1 P7.2 Q1.2 Q2.2 Q3.2 R4.1 R5.1 R6.2 R7.2 R10.2 R14.1 R15.1 STM1.1 STM1.13 STM1.19 STM1.32 STM1.48 STM1.64 | length 299.2
  Top Layer w0.152: P5.1@17.572,45.737 21.012,45.737 C22.1 C23.1 24.426,45.346 24.6,45.172 24.6,42.598 24.302,42.3 v1(23.403,42.3) 21.578,42.3 21.564,42.314 R15.1 ; v1(23.424,36.842) 23.424,37.787 23.91,38.273 27.846,38.273 28.244,38.671 C11.1 C12.1 28.548,41.717 33.149,41.717 ; v1(31.85,33.617) STM1.13 STM1.13@33.955,33.617 ; STM1.1 33.174,41.692 33.149,41.717 ; STM1.64 33.149,41.717 ; C13.1@36.271,24.247 36.274,24.27 36.274,24.275 STM1.19 ; STM1.32 42.774,28.042 C7.1@44.707,26.109 ; R10.2 43.889,66.077 v1(43.889,67.031) ; C7.1@44.667,26.109 C7.1@44.707,26.109 ; C7.1 C7.1@44.707,26.109 ; STM1.48 46.418,39.617 49.012,42.211 C9.1 C10.1 ; C8.1@46.527,26.109 C7.1@44.707,26.109 ; v1(47.959,39.34) 52.574,39.34 P3.2 ; C16.1 C15.1 52.71,64.619 52.71,59.857 52.261,59.407 *2.6
  Top Layer w0.381: R4.1 v1(9.263,17.455) ; R5.1@16.435,17.438 v1(17.724,17.438) ; R14.1 v1(23.424,36.842) ; v1(28.356,26.587) C25.1 C24.1 26.697,23.468 27.349,22.816 *4.14 ; D8.1 38.586,50.809 ASM1.4 ; Q1.2 Q2.2 Q3.2 v1(44.715,12.714) ; C13.1 36.008,24.236 36.019,24.246 v1(36.726,24.246) ; 38.609,63.072 ASM1.2 ASM1.4 ; 38.609,63.095 38.609,65.005 39.658,66.054 R10.2 ; v1(38.625,44.489) C32.1 38.609,45.725 ASM1.4 ; C8.1 46.643,26.117 v1(47.947,26.117) 47.947,15.754 49.999,13.702 C20.1 C21.1 49.999,9.559 P1.4 ; v1(47.3,44.489) 48.863,44.489 C10.1
  Bottom Layer w0.152: v1(17.724,17.438) 17.767,17.455 v1@17.786,17.473 ; 23.421,39.648 23.428,39.648 ; v1(31.85,33.617) 31.85,29.075 32.564,28.361 v1(36.265,28.361) ; v1(43.889,67.031) 52.3,67.031 52.731,66.6 v1(52.731,64.64) ; v1@47.954,39.345 v1(47.959,39.34)
  Bottom Layer w0.381: v1(9.263,17.455) 17.767,17.455 21.719,17.455 21.746,17.482 ; P7.2 P7.1 21.746,17.482 ; v1(23.403,42.3) 23.421,42.282 23.421,39.648 v1@23.421,36.858 ; v1(23.424,36.842) 23.424,24.291 23.468,24.247 ; v1(28.356,26.587) 28.356,24.279 28.325,24.247 ; R7.2 R6.2 33.88,44.489 v1(38.625,44.489) v1(47.3,44.489) 47.954,43.834 v1@47.954,39.345 ; 37.403,24.247 28.325,24.247 ; 37.422,24.247 44.702,24.247 ; v1(44.715,12.714) 44.715,24.234 44.702,24.247 ; v1(47.947,26.117) v1@47.959,26.129 ; v1(47.959,39.34) v1@47.959,26.129 ; 21.746,17.482 21.746,23.114 22.88,24.247 23.468,24.247 ; 23.468,24.247 28.325,24.247 ; 44.702,24.247 47.042,24.247 47.959,25.164 v1@47.959,26.129
+5: *6.1 ASM1.3 C27.1 C29.1 C30.1 L1.2 P2.2 P4.2 R17.2 | length 82.3
  Top Layer w0.381: L1.2 9.079,56.573 R17.2 C29.1 C30.1 36.295,56.573 ASM1.3 36.309,60.119 *6.1
  Top Layer w0.762: C30.1 33.39,56.516 33.448,56.458 v1(33.448,53.978)
  Bottom Layer w0.762: v1(33.448,53.978) 52.67,53.978 54.406,52.241 54.406,33.936 ; P4.2 54.406,33.936 ; P2.2 54.406,33.936
+5_USB: *2.7 *2.8 *3.5 *6.2 C17.1 C18.1 C19.1 J1.1 | length 59.4
  Top Layer w0.152: 44.788,67.717 44.788,65.49 C18.1 C17.1 49.124,63.119 *2.8 *2.7 ; v1(53.126,58.628) *3.5 ; v1(57.626,57.657) J1.1
  Top Layer w0.381: *6.2 36.334,67.225 36.826,67.717 44.788,67.717 58.041,67.717 60.683,65.074 60.683,57.945 60.396,57.657 J1.1
  Bottom Layer w0.152: v1(53.126,58.628) 53.126,56.944 C19.1 54.878,55.192 56.057,55.192 57.225,56.36 57.225,57.256 v1(57.626,57.657)
D1_N: *2.5 *3.4 | length 4.2
  Top Layer w0.152: *2.5 52.254,58.907 52.474,59.128 *3.4
D1_P: *2.4 *3.6 | length 4.3
  Top Layer w0.152: *2.4 52.242,58.407 52.521,58.128 *3.6
D_N: *3.3 J1.2 | length 4.6
  Top Layer w0.152: *3.3 56.581,59.128 57.403,58.307 J1.2
D_P: *3.1 J1.3 | length 4.6
  Top Layer w0.152: *3.1 v1(56.568,58.128) ; v1(57.396,58.957) J1.3
  Bottom Layer w0.152: v1(56.568,58.128) v1(57.396,58.957)
ENCODER_1_A: *4.1 P7.4 | length 19.5
  Top Layer w0.152: *4.1 20.719,20.198 20.719,8.722 P7.4
ENCODER_1_B: *4.3 P7.6 | length 17.5
  Top Layer w0.152: *4.3 22.298,20.276 21.783,19.761 21.783,14.419 22.792,13.41 22.792,8.649 P7.6
ENCODER_2_A: *4.13 P7.3 | length 14.7
  Top Layer w0.152: P7.3 23.746,13.34 24.134,13.728 26.106,13.728 27.158,14.78 27.158,20.91 27.794,21.546 *4.13
ENCODER_2_B: *4.11 P7.5 | length 10.1
  Top Layer w0.152: P7.5 25.746,12.775 27.462,14.491 27.462,18.549 27.92,19.006 *4.11
GND: *2.3 *2.29 *3.2 *4.7 *5.6 *5.9 ASM1.1 BTN1.1 BTN1.3 C1.1 C2.1 C3.1 C4.1 C5.2 C6.2 C7.2 C8.2 C9.2 C10.2 C11.2 C12.2 C13.2 C14.2 C15.2 C16.2 C17.2 C18.2 C19.2 C20.2 C21.2 C22.2 C23.2 C24.2 C25.2 C27.2 C28.2 C29.2 C30.2 C31.2 C32.2 D7.1 J1.5 J1.Shell JDC1.2 JDC1.3 P1.1 P2.3 P3.3 P4.3 P5.2 P6.2 P7.7 P7.8 R1.1 R2.1 R3.1 R8.1 R9.1 R11.1 R12.1 R13.1 R18.1 R19.1 R20.1 RST1.1 RST1.3 STM1.12 STM1.18 STM1.63 | length 489.4
  Top Layer w0.152: RST1.3 0.78,11.046 0.78,16.579 1.656,17.455 C5.2 ; 9.695,9.691 9.695,15.649 C6.2 ; P5.2@17.467,42.789 18.623,43.946 C22.2 C23.2 ; C3.1 25.046,34.799 v1(25.878,33.968) C4.1 ; C11.2 C12.2@26.844,41.04 ; C12.2 C12.2@26.844,41.04 ; STM1.12 34.746,34.117 35.774,35.145 STM1.63 35.774,43.025 35.541,43.259 27.114,43.259 v1(25.87,42.014) C12.2@26.844,41.04 ; C13.2 C14.2 ; C14.2@34.88,26.274 34.59,26.564 34.59,26.894 35.774,28.079 STM1.18 ; C32.2 v1(40.992,45.709) ; 40.871,48.679 40.909,48.717 ASM1.1 40.909,59.141 R13.1 v1(43.271,59.765) ; C1.1 C7.2 C8.2 ; C18.2 C17.2 C16.2 C15.2 ; *2.29@48.795,58.478 48.795,59.507 v2(48.724,59.507) v2(47.624,59.507) v2(46.524,59.507) v2(47.624,58.407) 48.124,57.907 *2.3 ; R11.1 50.338,49.036 v1(50.371,49.07) ; C2.1 C9.2 C10.2 v1(50.412,45.745) ; *3.2 v1(55.908,58.628) ; J1.Shell@62.018,60.257 J1.Shell@62.168,60.107
  Top Layer w0.381: JDC1.3 14.207,76.215 C28.2 30.406,76.215 33.447,73.174 C30.2 C29.2 31.507,60.684 30.794,61.397 R19.1 29.355,61.609 D7.1 ; C27.2 20.501,50.8 R20.1 ; *4.7 v1(25.252,15.196) ; v1(25.297,22.637) C24.2 C25.2 ; *5.9 25.976,63.359 *5.6 25.987,65.46 R18.1 ; P7.8 P7.7 ; C32.2 C31.2 40.871,48.679 ; 40.909,48.717 41.237,49.046 R12.1 ; J1.Shell@59.113,61.182 59.363,60.932 J1.5
  Top Layer w0.762: RST1.3 RST1.1 9.695,9.691 BTN1.3 BTN1.1 ; JDC1.3 6.842,72.368 3.506,69.032 3.506,54.768 5.911,52.363 18.937,52.363 C27.2 ; 62.123,63.086 62.168,63.041 62.168,60.107 62.168,57.807 62.168,54.782
  Bottom Layer w0.152: 6.776,47.527 6.891,47.411 R9.1 ; P5.2@17.467,42.789 20.072,45.394 25.889,45.394 ; v1@25.878,42.014 25.878,45.383 25.889,45.394 ; R8.1 25.889,45.394 ; v1(40.992,45.709) v1@50.396,45.709 ; v1(43.271,59.765) 46.267,59.765 v2(46.524,59.507) 46.524,61.19 ; v1(46.545,66.072) 46.524,66.052 46.524,61.19 ; 46.591,61.124 46.524,61.19 ; v1(50.371,49.07) 50.396,49.045 v1@50.396,45.761 ; C19.2 55.908,56.72 v1(55.908,58.628)
  Bottom Layer w0.381: v1(25.252,15.196) 25.297,15.241 v1(25.297,22.637) ; R8.1 R9.1 ; P4.3 P2.3
  Bottom Layer w0.762: 6.776,47.527 6.776,68.784 JDC1.3 ; JDC1.2 54.007,76.178 62.045,68.139 J1.Shell@62.045,63.132 ; P1.1 46.476,12.938 47.717,14.18 P6.2 60.752,14.18 62.168,15.596 62.168,45.58 ; P3.3 62.168,45.58 ; J1.Shell@59.113,56.732 61.063,54.782 62.168,54.782 62.168,45.58 ; J1.Shell@59.113,61.182 61.063,63.132 J1.Shell@62.045,63.132 ; J1.Shell@62.168,63.132 J1.Shell@62.045,63.132
  other v1: 39.593,9.471 44.203,9.486 34.983,9.501 5.017,11.848 5.575,11.848 5.017,12.406 5.575,12.406 25.038,18.443 25.596,18.443 25.038,19.001 25.596,19.001 40.535,19.055 40.535,19.692 40.535,20.33 40.535,20.967 40.535,21.604 42.945,21.938 43.504,21.938 46.09,21.938 46.649,21.938 40.535,22.242 42.945,22.496 43.504,22.496 46.09,22.496 46.649,22.496 40.535,22.879 40.535,23.517 21.615,26.561 22.173,26.561 21.615,27.119 22.173,27.119 3.457,27.236 4.015,27.236 8.543,27.236 9.101,27.236 3.457,27.794 4.015,27.794 8.543,27.794 9.101,27.794 21.615,27.791 22.173,27.791 44.596,27.784 45.154,27.784 21.615,28.349 22.173,28.349 44.596,28.342 45.154,28.342 27.389,28.748 27.947,28.748 27.389,29.307 27.947,29.307 29.835,32.531 30.393,32.531 20.335,32.714 20.893,32.714 24.691,32.732 25.249,32.732 29.835,33.09 30.393,33.09 20.335,33.273 20.893,33.273 24.691,33.29 25.249,33.29 35.902,33.898 36.46,33.898 35.902,34.456 36.46,34.456 3.435,37.477 3.994,37.477 8.521,37.477 9.079,37.477 3.435,38.035 3.994,38.035 8.521,38.035 9.079,38.035 30.129,38.432 30.687,38.432 22.485,38.545 30.129,38.99 30.687,38.99 22.866,39.039 20.865,39.17 21.565,39.193 24.526,39.434 25.084,39.434 3.457,39.597 4.015,39.597 8.543,39.596 9.101,39.596 22.004,39.739 24.526,39.992 25.084,39.992 3.457,40.155 4.015,40.155 8.543,40.154 9.101,40.154 22.551,40.247 24.79,40.732 25.399,41.286 27.348,42.798 27.985,42.798 28.622,42.798 29.26,42.798 29.897,42.798 30.534,42.798 31.172,42.798 31.809,42.798 46.32,42.801 46.878,42.801 25.157,43.265 46.32,43.359 46.878,43.359 43.366,43.644 25.646,43.777 26.065,44.196 26.778,44.53 27.415,44.53 28.053,44.53 28.69,44.53 29.327,44.53 29.965,44.53 30.602,44.53 31.24,44.53 43.366,45.736 43.932,45.736 3.435,49.838 3.994,49.838 8.521,49.837 9.079,49.837 3.435,50.396 3.994,50.396 8.521,50.395 9.079,50.395 42.542,50.389 43.1,50.389 24.68,50.77 25.238,50.77 42.542,50.947 43.1,50.947 24.68,51.329 25.238,51.329 56.359,52.373 56.917,52.373 56.359,52.931 56.917,52.931 26.454,53.768 27.012,53.768 26.454,54.326 27.012,54.326 16.099,58.693 16.657,58.693 16.099,59.251 16.657,59.251 3.897,60.614 4.455,60.614 7.82,60.642 8.378,60.642 3.897,61.172 4.455,61.172 7.82,61.201 8.378,61.201 32.247,62.664 32.805,62.664 32.247,63.222 32.805,63.222 57.302,70.732 57.86,70.732 57.302,71.29 57.86,71.29 35.35,73.512 35.908,73.512 35.35,74.07 35.908,74.07 24.304,81.717 24.862,81.717 24.304,82.275 24.862,82.275
  other v2: 46.524,57.307 47.624,57.307 48.724,57.307 46.524,58.407 48.724,58.407 24.241,62.174 25.341,62.174 26.441,62.174 24.241,63.274 25.341,63.274 26.441,63.274
LED_G: Q3.3 STM1.26 | length 16.9
  Top Layer w0.152: STM1.26 39.774,14.96 Q3.3
LED_R: Q1.3 STM1.24 | length 21.7
  Top Layer w0.152: Q1.3 32.707,14.603 36.927,14.603 38.774,16.45 STM1.24
LED_Y: Q2.3 STM1.25 | length 17.5
  Top Layer w0.152: Q2.3 39.274,16.519 STM1.25
Net*1_1: *1.1 C3.2 STM1.5 | length 8.7
  Top Layer w0.152: C3.2 25.341,36.571 *1.1 28.198,37.617 STM1.5
Net*1_3: *1.3 C4.2 STM1.6 | length 7.7
  Top Layer w0.152: C4.2 29.351,33.811 *1.3 30.355,35.874 30.355,36.801 30.671,37.117 STM1.6
Net*2_9: *2.9 R10.1 | length 7.7
  Top Layer w0.152: R10.1 43.866,63.42 44.435,62.851 47.422,62.851 48.624,61.649 *2.9
Net*2_12: *2.12 D6.1 | length 6.4
  Top Layer w0.152: D6.1 46.812,61.918 47.124,61.606 *2.12
Net*2_25: *2.25 D5.1 STM1.51 | length 20.2
  Top Layer w0.152: STM1.51 41.774,46.414 42.9,47.54 46.957,47.54 47.624,48.207 47.624,54.145 ; D5.1 47.615,54.154 47.624,54.145 ; *2.25 47.624,54.145
Net*2_26: *2.26 D4.1 STM1.52 | length 21.2
  Top Layer w0.152: STM1.52 41.292,41.735 v1(41.292,43.289) ; v1(42.249,43.289) 42.249,46.023 43.294,47.068 47.21,47.068 48.124,47.983 48.124,54.188 ; *2.26 48.124,54.188 ; D4.1 48.168,54.145 48.124,54.188
  Bottom Layer w0.152: v1(41.292,43.289) v1(42.249,43.289)
Net*4_2: *4.2 STM1.15 | length 19.4
  Top Layer w0.152: *4.2 23.338,21.644 24.291,22.597 24.291,30.074 24.893,30.676 30.898,30.676 31.659,31.437 31.659,32.322 31.954,32.617 STM1.15
Net*4_4: *4.4 STM1.21 | length 22.8
  Top Layer w0.152: *4.4 26.602,22.27 36.838,22.27 37.274,22.706 STM1.21
Net*4_10: *4.10 STM1.23 | length 20.7
  Top Layer w0.152: *4.10 36.441,17.736 38.274,19.57 STM1.23
Net*4_12: *4.12 STM1.22 | length 18.6
  Top Layer w0.152: *4.12 37.497,20.276 37.774,20.554 STM1.22
Net*5_1: *5.1 C26.2 | length 8.8
  Top Layer w0.381: C26.2 16.839,60.192 17.032,59.999 *5.1
Net*5_4: *5.4 R17.1 R19.2 | length 4.3
  Top Layer w0.381: *5.4 29.564,59.999 R19.2 R17.1
Net*5_5: *5.5 R16.1 R18.2 | length 4.4
  Top Layer w0.381: *5.5 27.246,67.755 R18.2 R16.1 R16.1@29.283,67.896
NetBTN1_2: BTN1.2 BTN1.4 C6.1 R5.2 STM1.8 | length 45.8
  Top Layer w0.152: BTN1.2 12.381,14.771 12.84,15.23 C6.1 R5.2 ; BTN1.4 15.501,14.771 15.017,15.254 R5.2 ; STM1.8 32.299,36.117 31.354,35.173 31.354,31.563 30.772,30.981 20.085,30.981 19.302,30.198 19.302,21.464 18.282,20.444 15.346,20.444 15.017,20.116 R5.2
NetC1_2: C1.2 STM1.31 | length 4.2
  Top Layer w0.152: STM1.31 42.274,26.682 C1.2
NetC2_2: C2.2 STM1.47 | length 4.7
  Top Layer w0.152: STM1.47 46.502,39.117 47.846,40.461 C2.2
NetC5_1: C5.1 R4.2 RST1.2 RST1.4 STM1.7 | length 54.4
  Top Layer w0.152: RST1.2 3.652,14.771 4.162,15.281 C5.1 R4.2 ; RST1.4 6.875,14.771 6.281,15.365 R4.2 ; STM1.7 32.269,36.617 31.05,35.398 31.05,31.69 30.646,31.286 19.941,31.286 18.997,30.342 18.997,21.7 18.138,20.841 7.43,20.841 6.281,19.692 R4.2
NetD1_1: D1.1 Q1.1 | length 2.1
  Top Layer w0.152: Q1.1 31.777,11.771 D1.1
NetD1_2: D1.2 R1.2 | length 1.8
  Top Layer w0.152: D1.2 33.541,8.058 R1.2
NetD2_1: D2.1 Q2.1 | length 2.1
  Top Layer w0.152: D2.1 36.425,9.674 Q2.1
NetD2_2: D2.2 R2.2 | length 1.8
  Top Layer w0.152: D2.2 38.216,8.058 R2.2
NetD3_1: D3.1 Q3.1 | length 2.1
  Top Layer w0.152: D3.1 Q3.1
NetD3_2: D3.2 R3.2 | length 1.9
  Top Layer w0.152: D3.2 42.964,8.075 R3.2
NetD4_2: D4.2 R11.2 | length 2.1
  Top Layer w0.152: R11.2 49.252,50.51 D4.2
NetD5_2: D5.2 R12.2 | length 2.1
  Top Layer w0.152: R12.2 46.569,50.491 D5.2
NetD6_2: D6.2 R13.2 | length 2.2
  Top Layer w0.152: R13.2 40.142,59.774 D6.2
NetD8_2: D8.2 R20.2 | length 2.2
  Top Layer w0.381: R20.2 31.751,50.8 D8.2
NetP1_2: P1.2 STM1.29 | length 25.9
  Top Layer w0.152: STM1.29 41.274,17.619 46.104,12.789 46.104,9.454 P1.2
NetP1_3: P1.3 STM1.30 | length 26.9
  Top Layer w0.152: STM1.30 41.774,17.874 46.675,12.973 46.675,10.329 49.921,7.082 P1.3
NetP2_1: P2.1 STM1.44 | length 16
  Top Layer w0.152: STM1.44 58.47,37.617 P2.1
NetP3_1: P3.1 STM1.46 | length 16.3
  Top Layer w0.152: STM1.46 57.724,38.617 57.94,38.834 57.94,40.277 57.692,40.526 P3.1
NetP3_4: P3.4 STM1.49 | length 16.4
  Top Layer w0.152: STM1.49 42.774,42.086 48.834,48.146 P3.4
NetP4_1: P4.1 STM1.43 | length 7.9
  Top Layer w0.152: STM1.43 51.103,37.117 P4.1
NetP5_3: P5.3 R15.2 STM1.61 | length 22.5
  Top Layer w0.152: P5.3@17.572,40.733 21.382,40.733 R15.2 23.483,40.753 26.781,44.051 36.076,44.051 36.774,43.353 STM1.61
NetP5_4: P5.4 R14.2 STM1.62 | length 22.6
  Top Layer w0.152: P5.4@17.514,38.193 21.354,38.193 R14.2 26.725,43.564 35.844,43.564 36.274,43.133 STM1.62
NetP6_3: P6.3 STM1.35 | length 22.5
  Top Layer w0.152: STM1.35 46.327,33.117 46.557,32.887 46.557,28.194 50.492,24.259 50.492,21.932 P6.3
NetP6_4: P6.4 STM1.36 | length 21
  Top Layer w0.152: STM1.36 46.352,33.617 46.862,33.108 46.862,28.32 50.797,24.385 50.797,23.627 P6.4
NetP6_5: P6.5 STM1.37 | length 19.5
  Top Layer w0.152: STM1.37 46.33,34.117 47.166,33.28 47.166,29.198 56.185,20.18 P6.5
NetP6_6: P6.6 STM1.38 | length 18
  Top Layer w0.152: STM1.38 46.398,34.617 47.471,33.544 47.471,30.953 P6.6
NetP6_7: P6.7 STM1.39 | length 16.5
  Top Layer w0.152: STM1.39 46.393,35.117 47.776,33.734 47.776,32.648 P6.7
NetP6_8: P6.8 STM1.40 | length 15.3
  Top Layer w0.152: STM1.40 46.324,35.617 55.762,26.18 P6.8
NetR6_1: R6.1 R8.2 STM1.28 | length 28.5
  Top Layer w0.152: v1(40.36,28.425) 40.354,28.431 40.774,28.851 STM1.28
  Bottom Layer w0.152: R8.2 R6.1 31.575,45.13 32.645,44.06 39.864,44.06 40.36,43.564 v1(40.36,28.425)
NetR7_1: R7.1 R9.2 STM1.60 | length 15.6
  Top Layer w0.152: v1(31.584,48.726) 36.667,48.726 37.274,48.119 STM1.60
  Bottom Layer w0.152: R9.2 R7.1 31.575,48.716 v1(31.584,48.726)
PH: *5.8 C26.1 D7.2 L1.1 | length 16.5
  Top Layer w0.381: L1.1 15.008,65.585 C26.1 18.535,65.449 D7.2@20.34,65.449 ; D7.2@20.341,65.449 *5.8
VIN: *5.7 C28.1 JDC1.1 R16.2 | length 24.4
  Top Layer w0.381: *5.7 24.711,65.454 C28.1 29.482,71.315 30.669,70.129 R16.2
  Top Layer w0.762: JDC1.1 16.927,71.315 C28.1
pads on no net: *1.2 *1.4 *2.1 *2.2 *2.10 *2.11 *2.13 *2.14 *2.15 *2.16 *2.17 *2.18 *2.19 *2.20 *2.21 *2.22 *2.23 *2.24 *2.27 *2.28 *4.5 *4.6 *4.8 *4.9 *5.2 *5.3 H1.1 H2.1 H3.1 H4.1 J1.4 P5.5 P5.6 P5.7 P5.8 P5.9 P5.10 P6.1 P7.MH1 STM1.2 STM1.3 STM1.4 STM1.9 STM1.10 STM1.11 STM1.14 STM1.16 STM1.17 STM1.20 STM1.27 STM1.33 STM1.34 STM1.41 STM1.42 STM1.45 STM1.50 STM1.53 STM1.54 STM1.55 STM1.56 STM1.57 STM1.58 STM1.59

## Polygon pours and split planes (outlines as drawn)
GND on Top Layer "GND_L01_P005" (solid, remove dead copper, pour order 5): 0,0 0,84.171 63.561,84.171 63.561,0
VIN on Top Layer "VIN_L01_P002" (solid, remove dead copper, pour order 2): 25.217,68.932 25.51,69.225 25.51,72.72 25.342,72.889 15.186,72.889 13.414,71.116 13.412,68.559 22.822,68.559 24.206,67.175 24.206,65.488 24.422,65.273 25.002,65.273 25.217,65.488
PH on Top Layer "PH_L01_P000" (solid, remove dead copper, pour order 0): 18.054,63.334 19.18,64.461 23.452,64.461 23.74,64.748 23.74,66.935 23.341,67.334 11.034,67.334 11.034,63.832 11.532,63.334
GND on Bottom Layer "GND_L02_P004" (solid, remove dead copper, pour order 4): 0,0 0,84.171 63.561,84.171 63.561,0
GND on Bottom Layer "GND_L02_P003" (solid, remove dead copper, pour order 3): 30.754,36.251 31.222,36.719 34.771,36.731 35.289,36.214 35.289,33.58 35.826,33.05 37.378,33.05 37.378,36.071 35.325,38.125 25.37,38.125 24.219,36.974 24.212,33.515 25.69,32.036 29.393,32.036 30.754,33.397

## Keep-outs
Keep-Out Layer:
  the board outline again, w0.254

## Silkscreen, mask and mechanical layers (free items; w line width, h text height)
Top Overlay:
  region: 97 vertices and 7 holes, not listed, extent 31.05,74.973 42.836,80.256
  region: 36.537,80.459 35.927,80.459 35.927,80.256 35.724,80.256 35.724,80.662 36.537,80.662
  region: 11.891,47.156 11.891,42.889 15.955,42.889 15.955,36.59 11.891,36.59 11.891,32.119 3.56,32.119 3.56,36.793 5.998,36.793 5.998,34.964 9.452,34.964 9.452,44.515 9.249,44.515 9.249,44.718 6.201,44.718 6.201,44.515 5.998,44.515 5.998,42.686 3.56,42.686 3.56,47.156 hole: 11.891,40.857 11.891,38.825 12.094,38.825 12.297,38.825 12.5,38.825 12.704,38.825 12.907,38.825 13.11,38.825 13.313,38.825 13.516,38.825 13.72,38.825 13.923,38.825 13.923,40.857 13.72,40.857 13.516,40.857 13.313,40.857 13.11,40.857 12.907,40.857 12.704,40.857 12.5,40.857 12.297,40.857 12.094,40.857
  text "NHAT MICLS" at 42.604,75.249 h2.03
  text "ST-LINK" at 54.311,39.398 h1.02 r90
  text "SERVOR" at 48.716,29.941 h1.02 r90
  text "SERVOR" at 56.61,29.792 h1.02 r90
  text "MPU-9250" at 15.33,22.103 h1.02 r90
  text "MOTOR" at 54.087,11.147 h1.02 r90
  text "UART" at 55.495,7.202 h1.02
  text "ENCODER" at 31.375,1.563 h1.02

## Text inside footprints (layer, text, board x,y; h text height)
J1: Mechanical 2 "PCB Edge" at 64.168,57.857 h0.41 r90